# Altium PCB 3043-1-1532.PcbDoc (part 1 of 2)
Units mm, origin at the board's own origin, x right, y up, seen from the top; angles counter-clockwise.
Board outline 86 x 85.71 mm, 4 copper layers (Top Layer, Mid-Layer 1, Mid-Layer 2, Bottom Layer); 181 components, 109 nets, 536 pads, 310 vias.
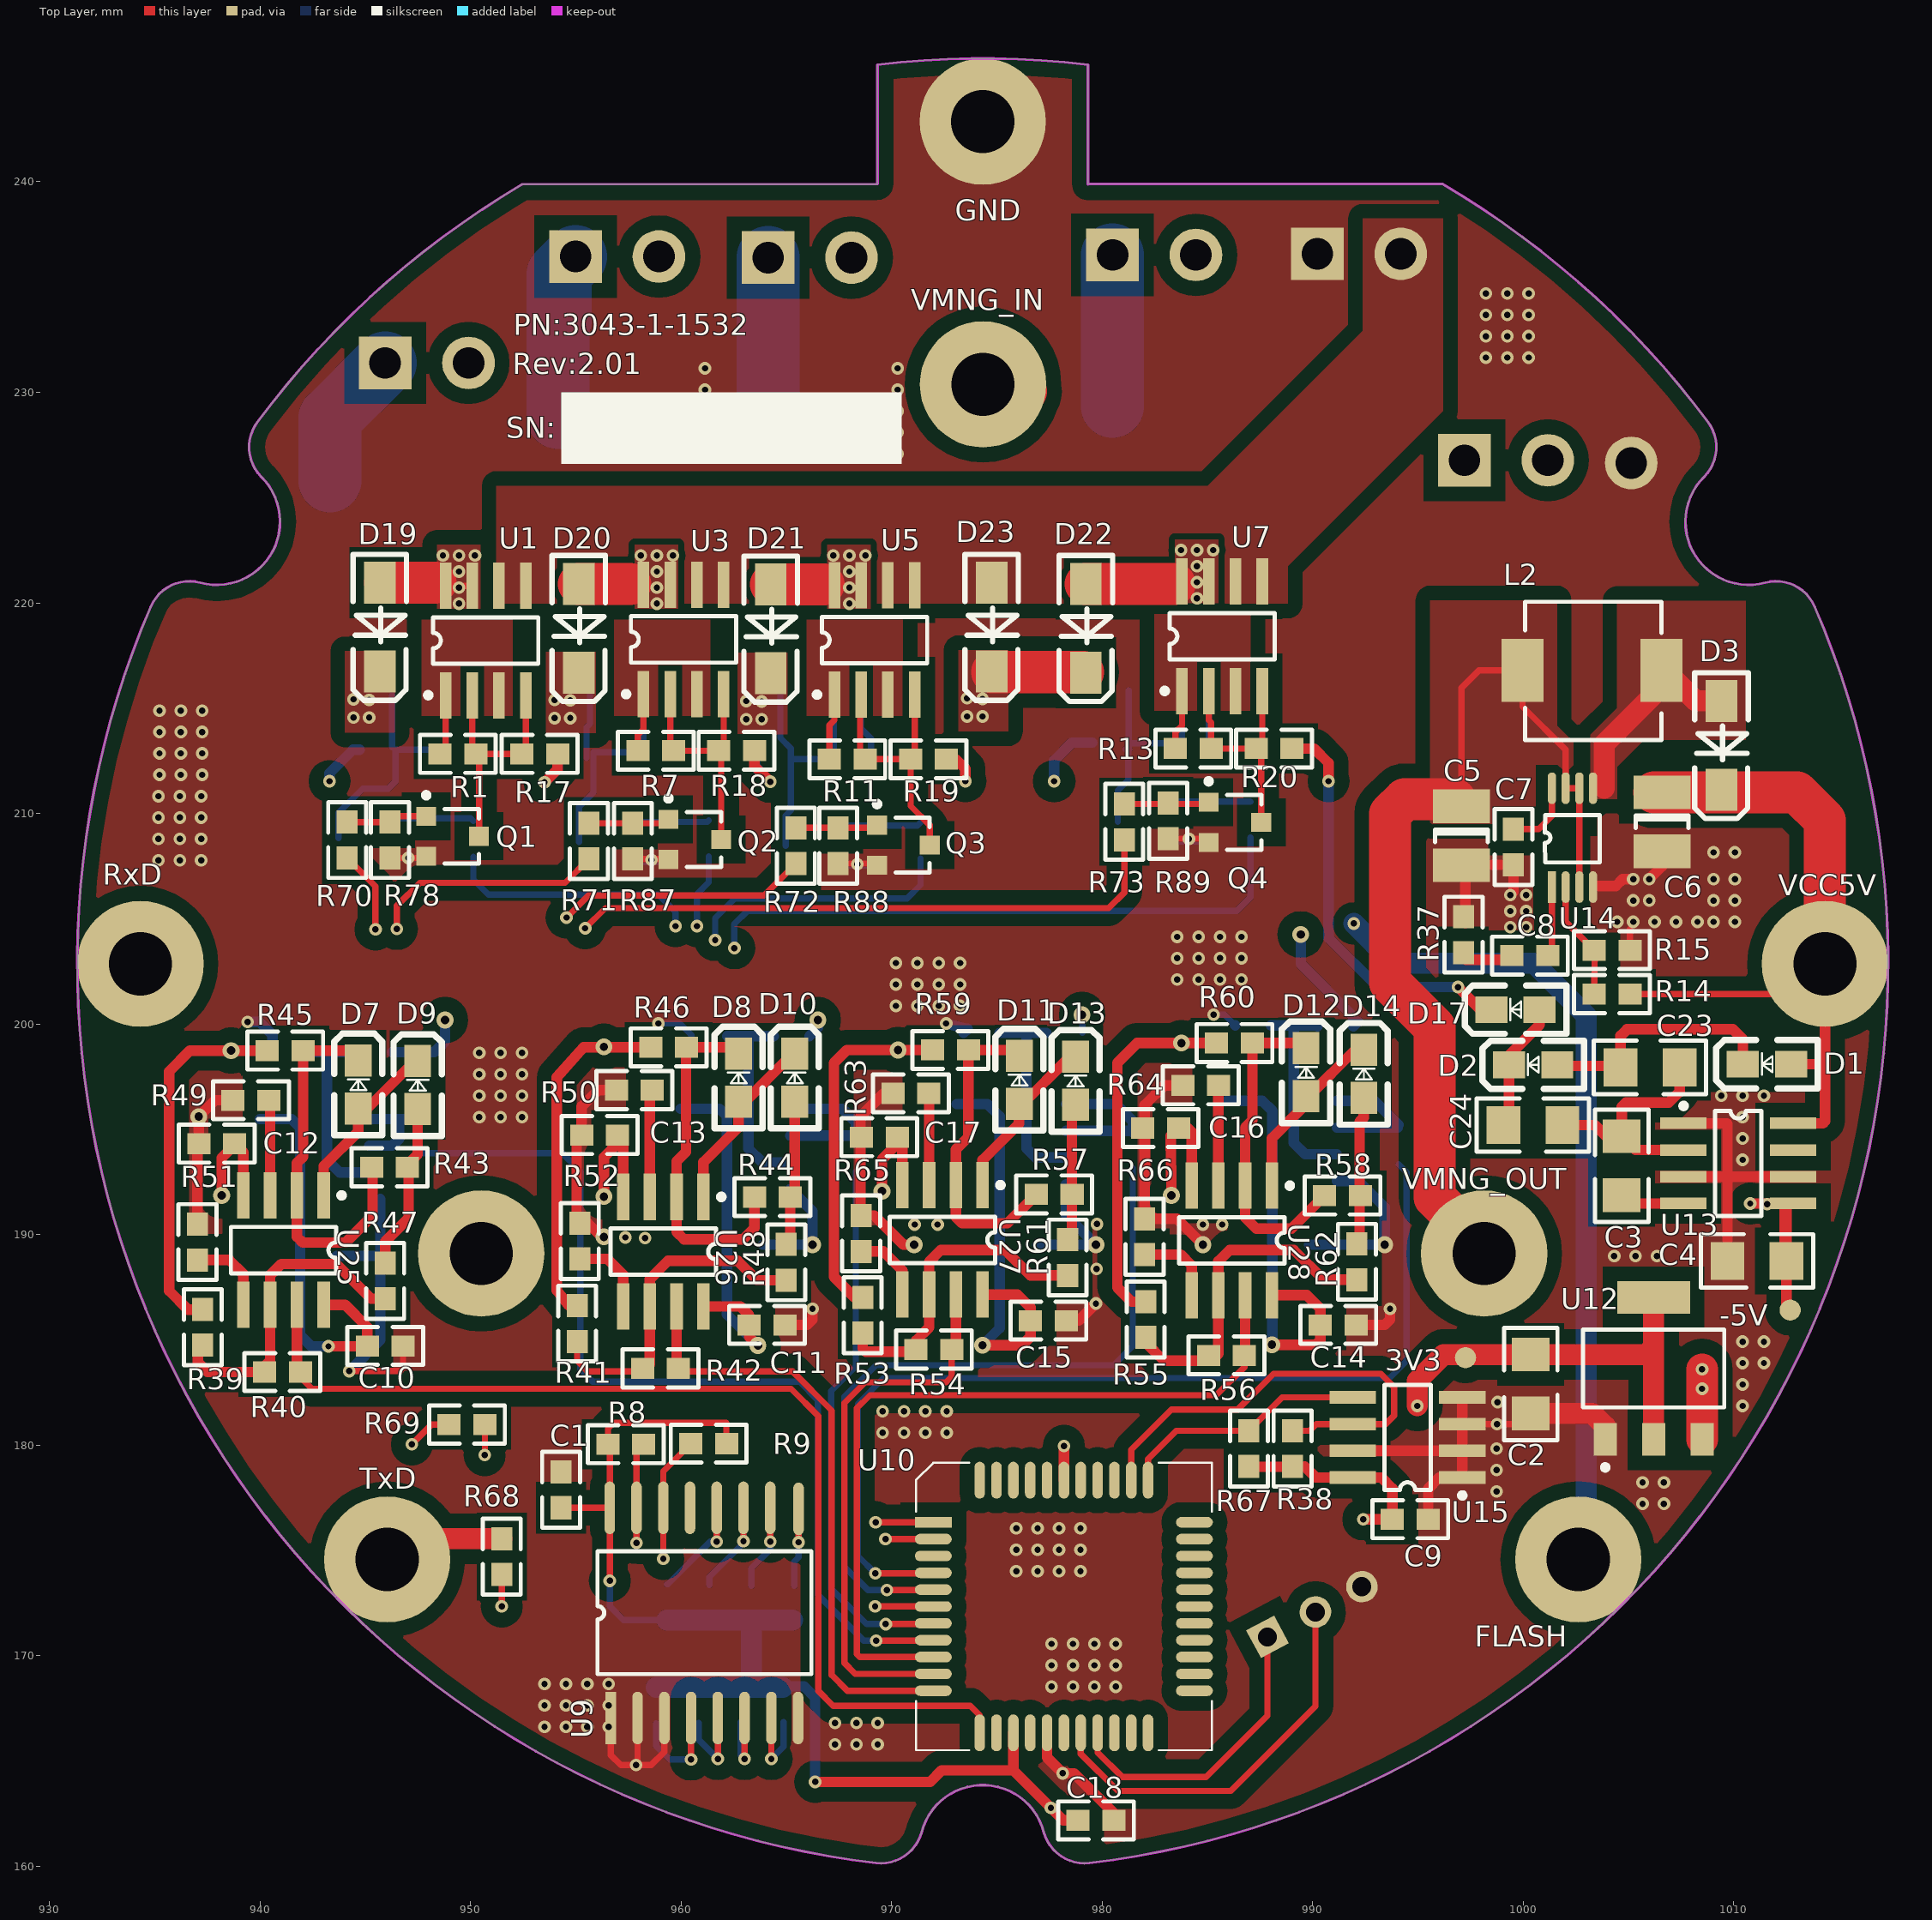
[diagram p0: Top Layer view]
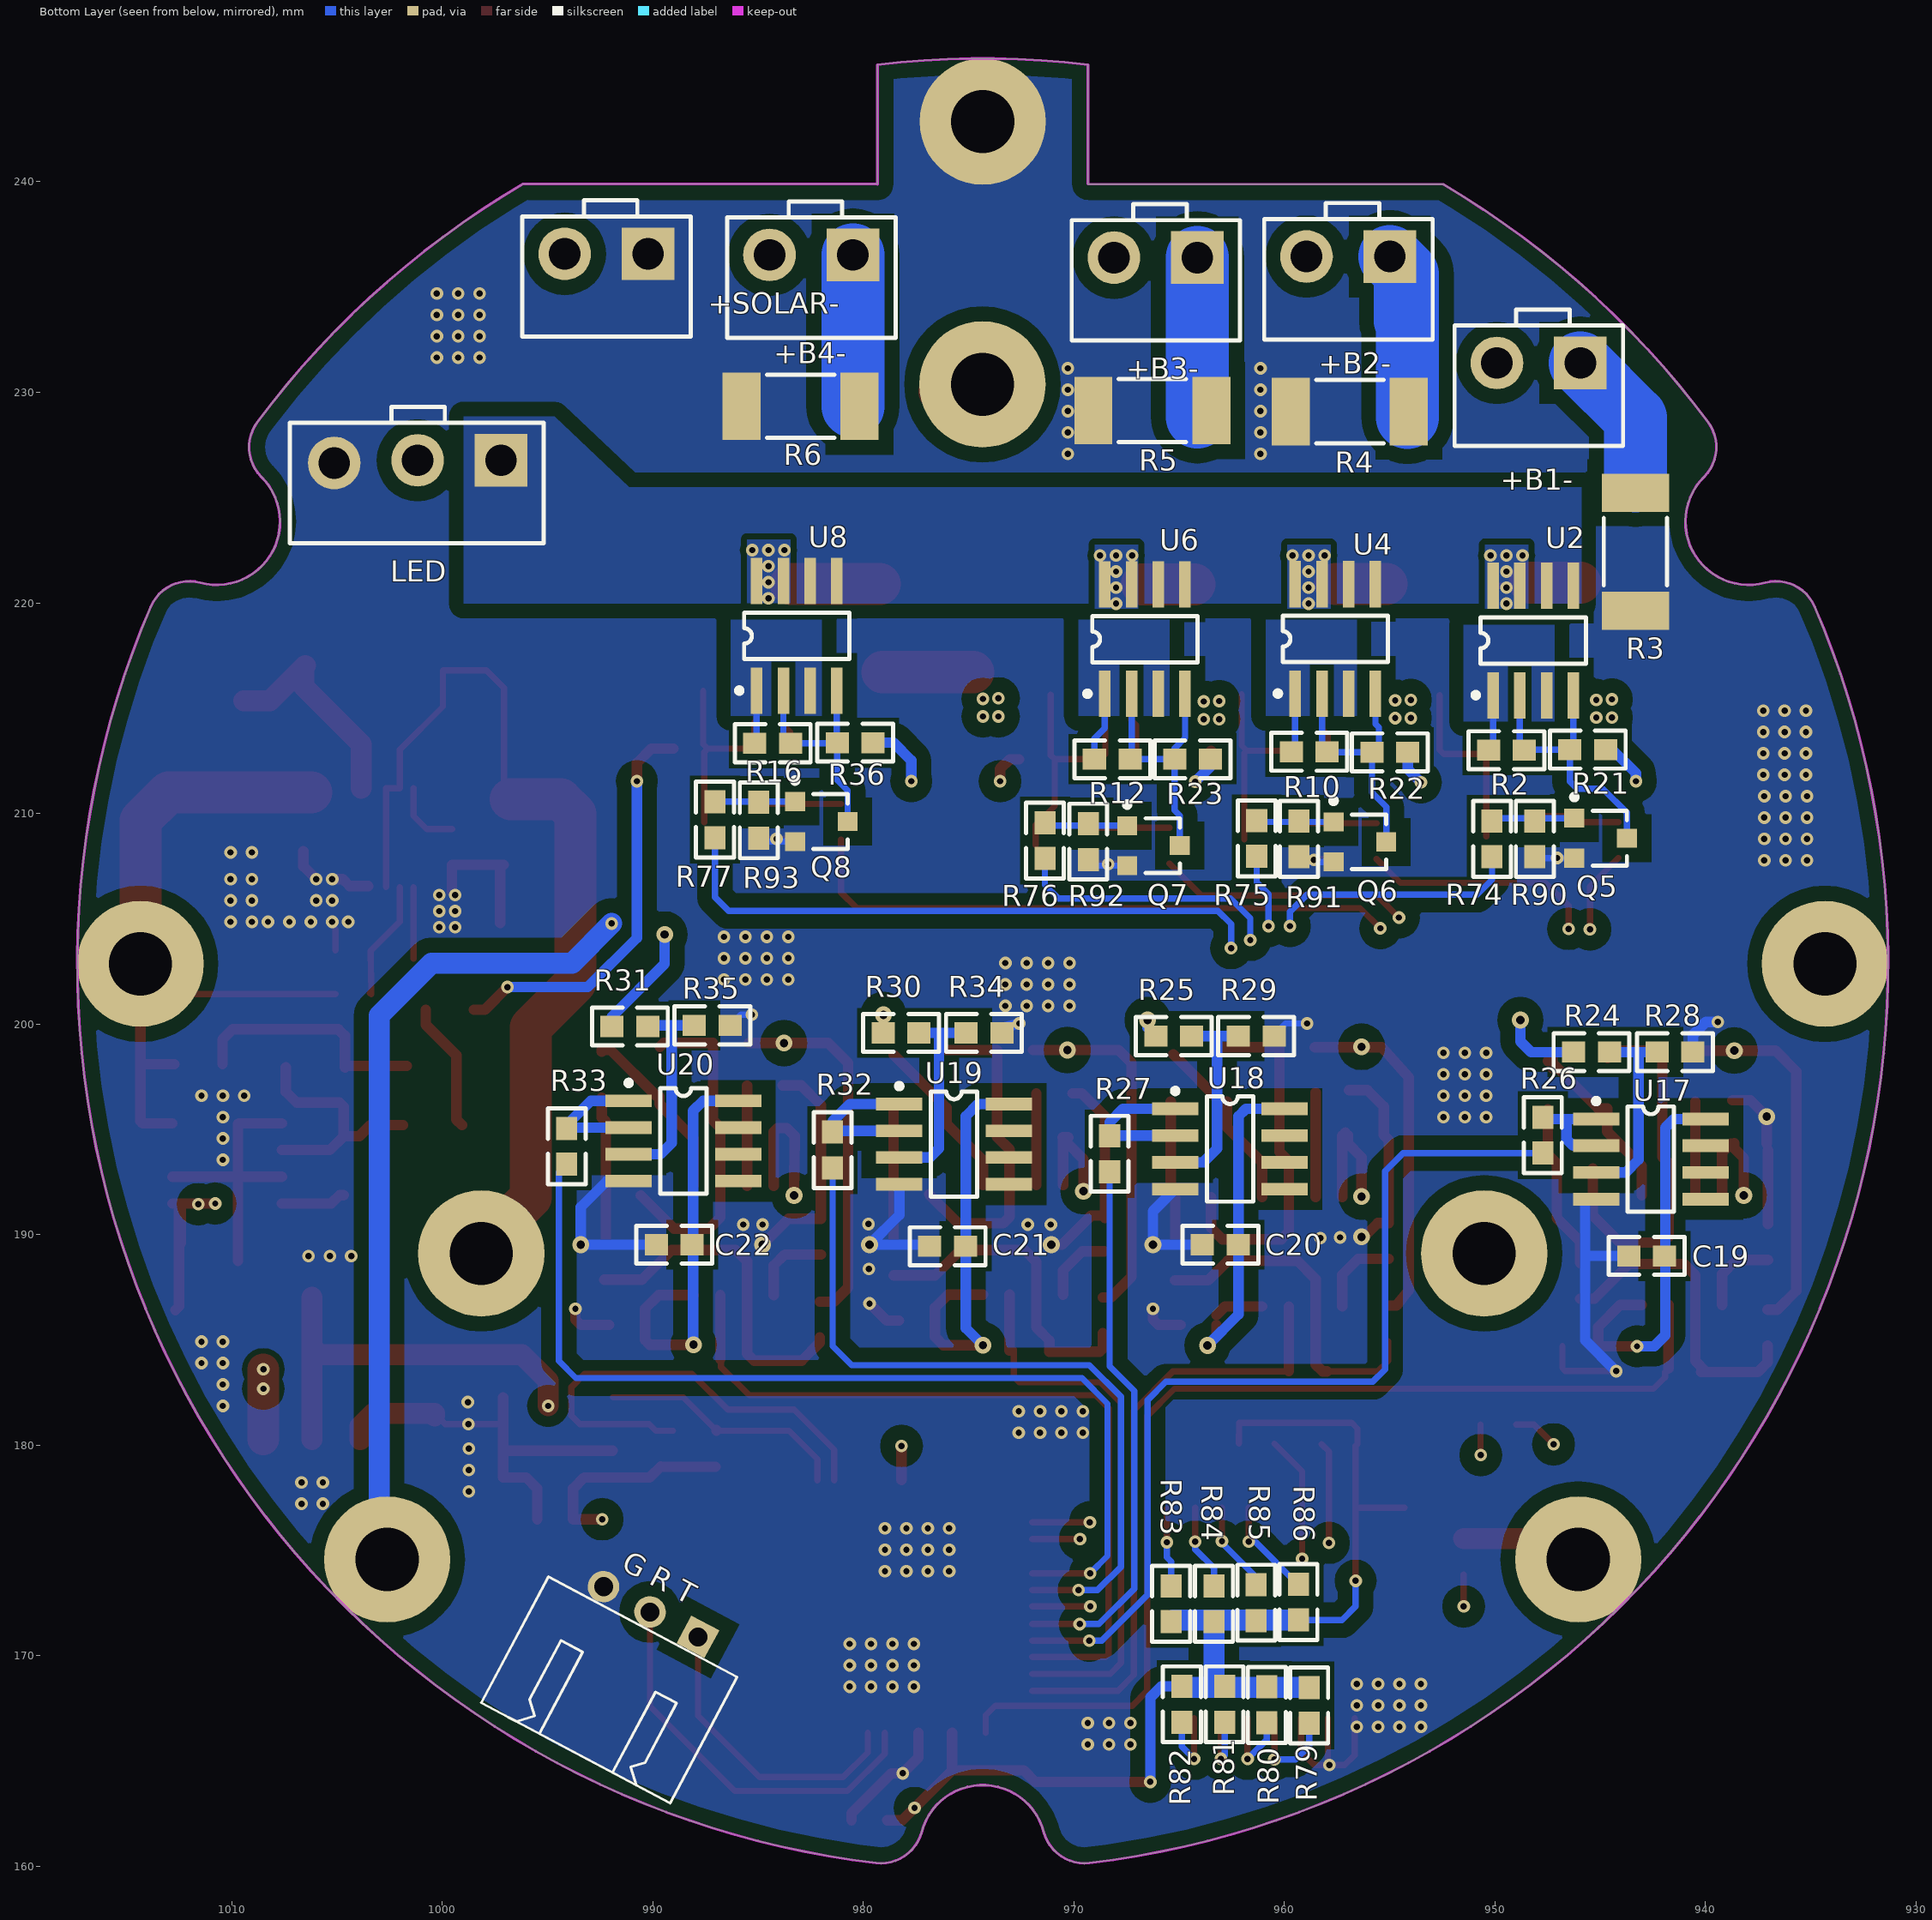
[diagram p1: Bottom Layer view, seen from below]
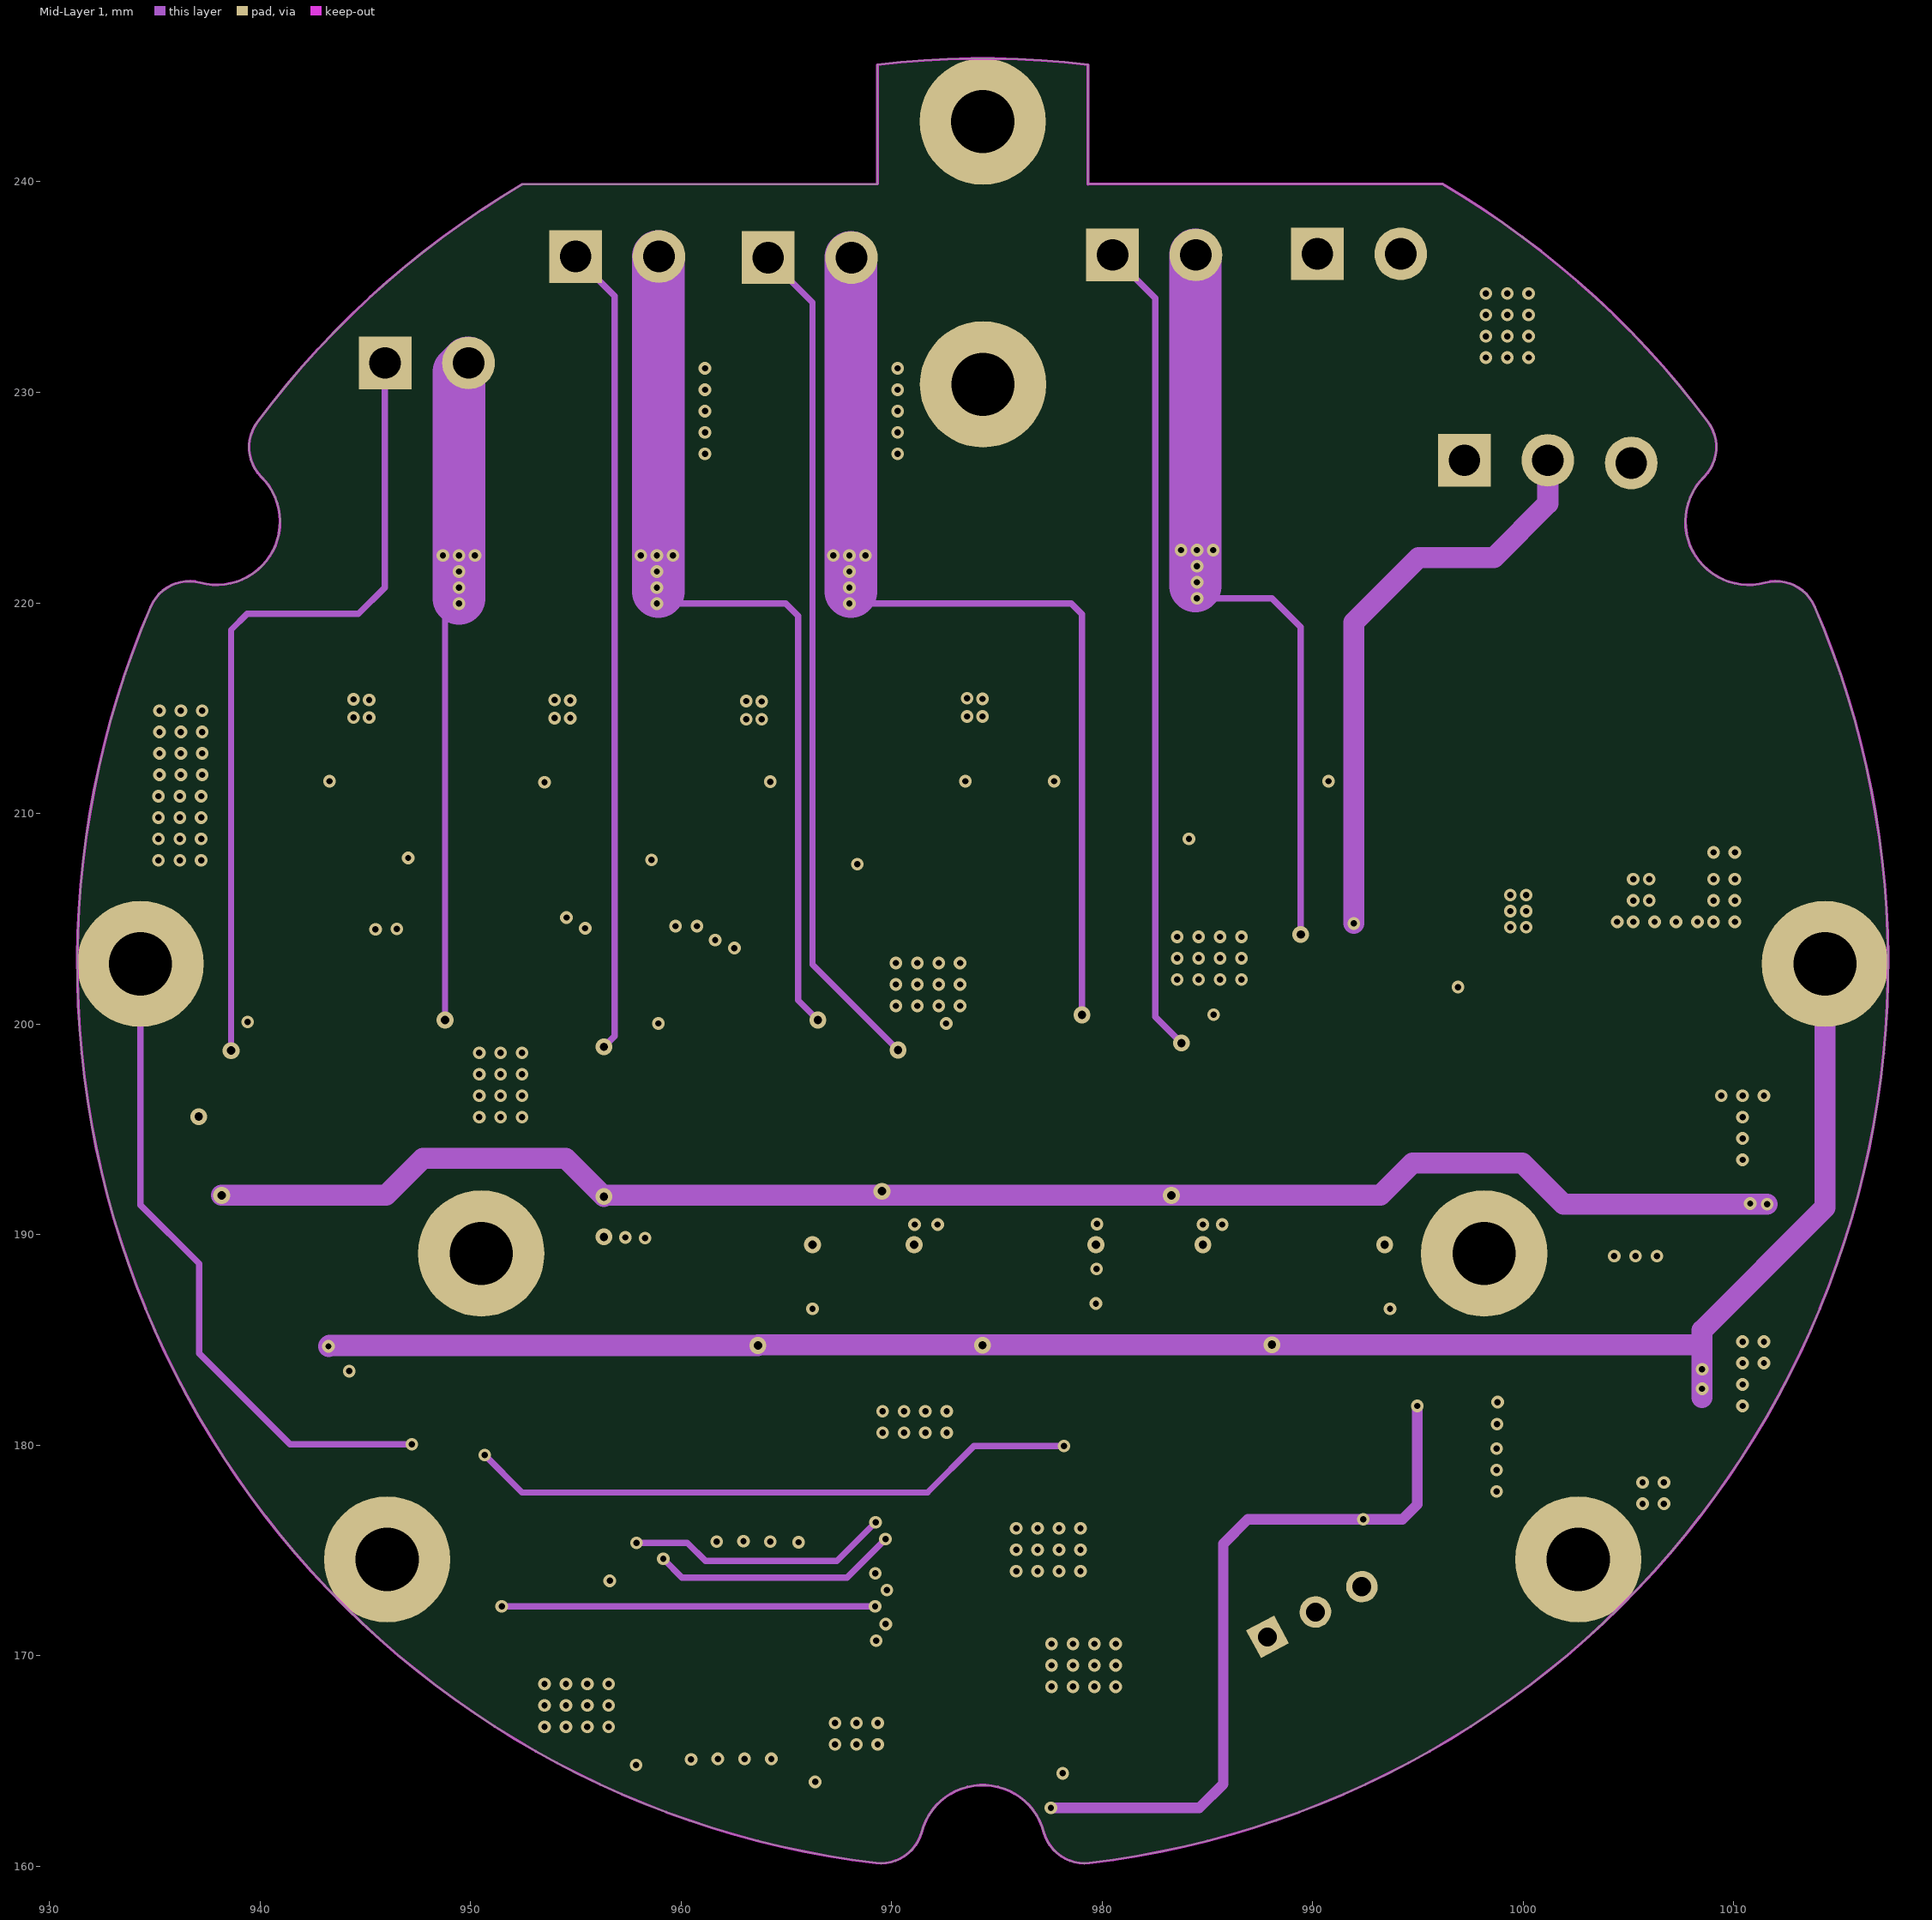
[diagram p2: Mid-Layer 1]
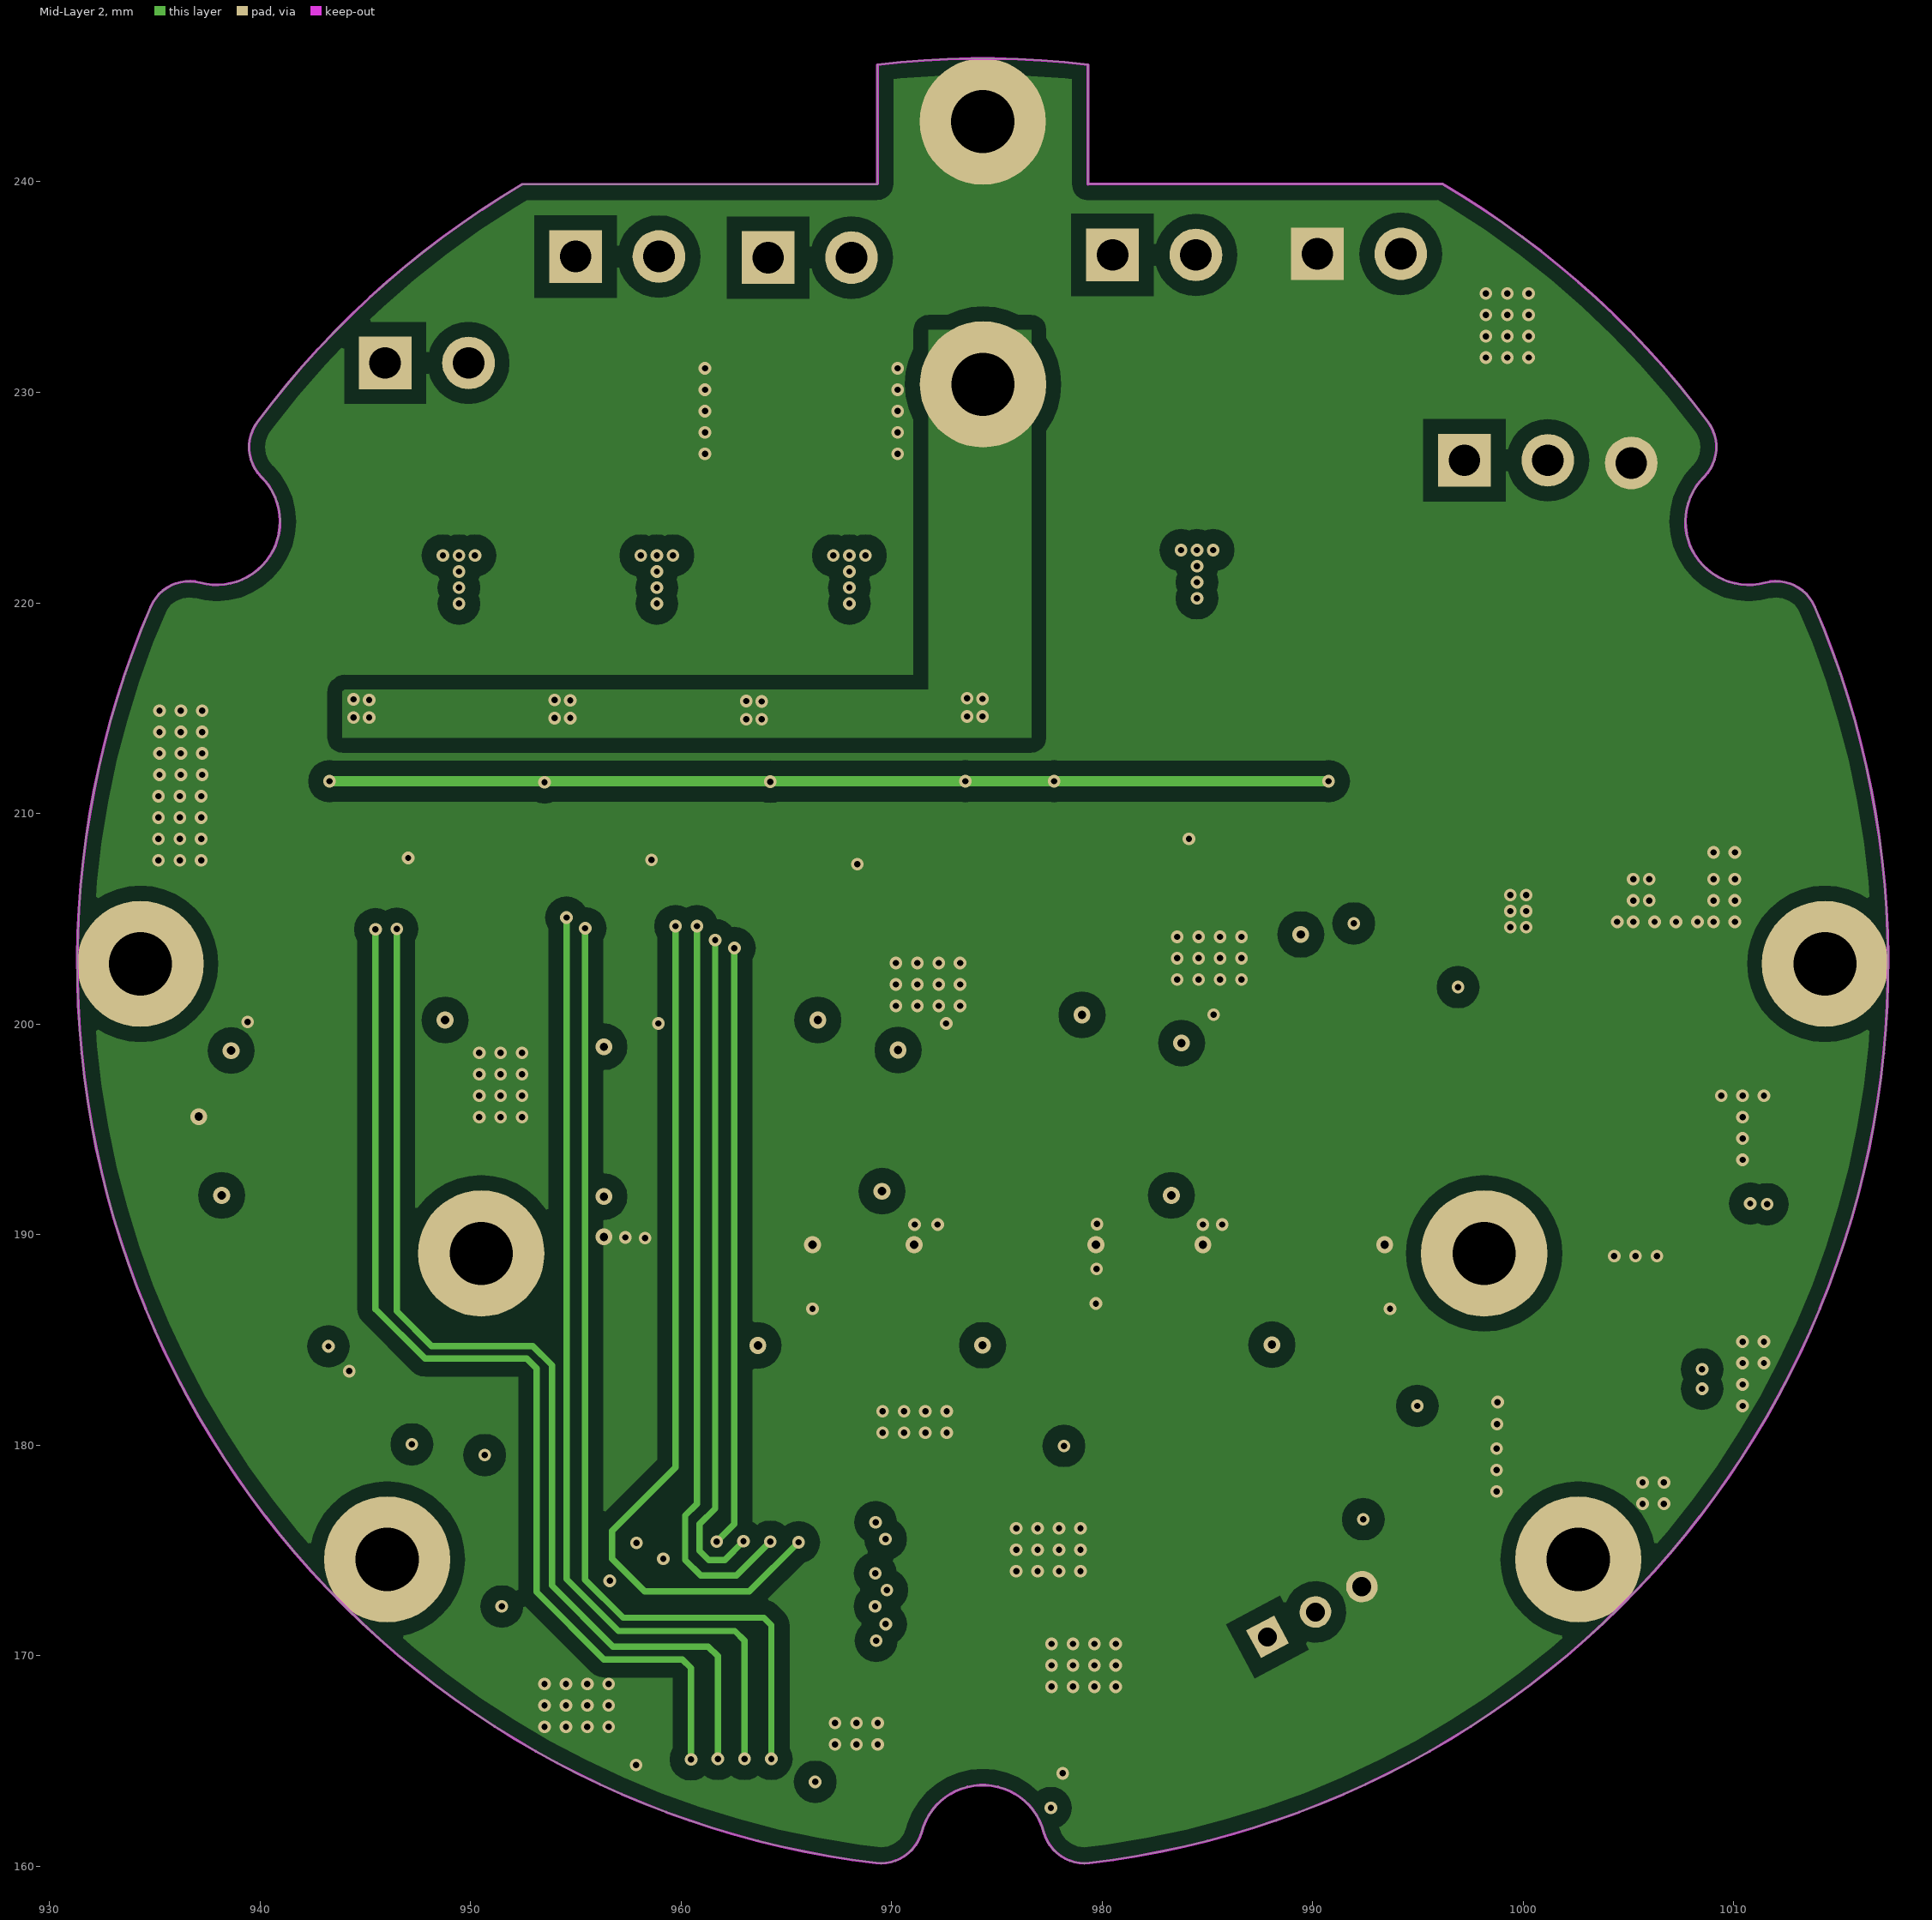
[diagram p3: Mid-Layer 2]

## Layer stack, top to bottom
Top Layer: signal copper 0.0356
Dielectric: dielectric 0.32, FR-4, Dk 4.8
Mid-Layer 1: signal copper 0.0356
Dielectric: dielectric 0.32, FR-4, Dk 4.8
Mid-Layer 2: signal copper 0.0356
Dielectric: dielectric 0.32, FR-4, Dk 4.8
Bottom Layer: signal copper 0.0356

## Board outline
934.813,219.818 cw(c936.651,219.029) 937.172,220.96 ccw(c937.953,223.856) 940.071,225.981 cw(c941.483,227.398) 939.881,228.595 cw(c974.326,202.856) 952.461,239.882 952.449,239.878 969.326,239.895 969.326,245.564 969.327,245.565 cw(c974.326,202.856) 979.326,245.565 979.326,245.564 979.326,239.887 996.165,239.898 cw(c974.326,202.856) 1008.772,228.595 cw(c1007.17,227.398) 1008.582,225.981 ccw(c1010.7,223.856) 1011.481,220.96 cw(c1012.002,219.029) 1013.84,219.818 cw(c974.326,202.856) 979.394,160.156 cw(c979.158,162.142) 977.226,161.628 ccw(c974.326,160.856) 971.427,161.628 cw(c969.494,162.142) 969.259,160.156 cw(c974.326,202.856)

## Design rules (kind name [scope] priority, off if disabled: settings)
Clearance [All] p1: gap=0.3
ComponentClearance [All] p1: gap=0 collisioncheckmode=2
HoleSize [All] p1: absolutevalues=TRUE maxlimit=10 minlimit=0.025 maxpercent=80.000 minpercent=20.000
PolygonConnect [All] p1: connectstyle=Direct reliefconductorwidth=0.254 reliefentries=4 polygonreliefangle="90 Angle"
RoutingLayers [All] p1: top layer_v5=TRUE mid layer 1_v5=FALSE mid layer 2_v5=FALSE bottom layer_v5=TRUE
RoutingVias [All] p1: holewidth=0.711 width=1.27 viastyle="Through Hole" minholewidth=0.711 minwidth=1.27 maxholewidth=0.711 maxwidth=1.27
SolderMaskExpansion [All] p1: expansion=0.102
TestPointUsage [All] p1: valid=0 allowmultiple=FALSE
Testpoint [All] p1: side=15 testpointundercomponent=TRUE minsize=1.016 maxsize=2.54 preferedsize=1.524 minholesize=0 maxholesize=1.016 preferedholesize=0.813 testpointgrid=0.025 style=1023 order=1234567890
Width [All] p1: maxlimit=10 minlimit=0.1 preferedwidth=0.254 toplayer_prefwidth=1 midlayer1_prefwidth=0.3 midlayer2_prefwidth=0.3 bottomlayer_prefwidth=1 minimp=50.000000 maximp=50.000000 favimp=50.000000
15 further rules are at their usual default settings.

## Classes and differential pairs
component class U_2-PWR_MANAGE: +B1- +B2- +B3- +B4- +SOLAR- C1 D17 Q1 Q2 Q3 Q4 Q5 Q6 Q7 Q8 R1 R2 R3 R4 R5 R6 R7 R8 R9 R10 R11 R12 R13 R16 R17 R18 R19 R20 R21 R22 R23 R36 R70 R71 R72 R73 R74 R75 R76 R77 R78 R79 R80 R81 R82 R83 R84 R85 R86 R87 R88 R89 R90 R91 R92 R93 SEN U1 U2 U3 U4 U5 U6 U7 U8 U9
component class U_5-PWR_ADC2: BT2 C19 C20 C21 C22 C32 C33 C34 C35 DS3 L1 L3 P5 R24 R25 R26 R27 R28 R29 R30 R31 R32 R33 R34 R35 TP4 TP5 U17 U18 U19 U20
component class U_5-PWR_ADC: C10 C11 C12 C13 C14 C15 C16 C17 C29 C30 C31 D7 D8 D9 D10 D11 D12 D13 D14 JP13 MARK1 MARK2 NET P3 P4 PWR R39 R40 R41 R42 R43 R44 R45 R46 R47 R48 R49 R50 R51 R52 R53 R54 R55 R56 R57 R58 R59 R60 R61 R62 R63 R64 R65 R66 Ref1 U25 U26 U27 U28 VR1 VR2
component class U_4-PWR_MANAGE_3: BT3 BT4 BT5 BT6 BT7 BT8 C9 C18 C25 C26 C27 C28 CN1 CN2 CP1 CP2 CP3 CP4 CP5 CP6 CP7 CP8 DBG FLASH "G R T" GND JP2 JP3 LED P2 R38 R67 R68 R69 RA3 RA4 RxD S1 S2 S3 S4 S5 S6 S7 S8 TP3 TP7 TP13 TP14 TP15 TP16 TP17 TP18 TxD u7 U10 U15 U24 U29 U30 U31 U57 U58 U59 U60 U61 U62 VCC5V Y1 Y2
component class U_3-PWR_BAK_BATT: 3V3 5V -5V BAT C2 C3 C4 C5 C6 C7 C8 C23 C24 C36 C38 D1 D2 D3 D19 D20 D21 D22 D23 G J1 J2 J3 J4 L2 NC P1 R14 R15 R37 R94 R95 R96 R97 R98 R99 R100 R101 R102 TP11 U12 U13 U14 U32 U63 U64 U65 U66 U67 U68 U69 VIN VMNG_IN VMNG_OUT VOUT

## Components (designator, comment, footprint, x,y, rotation, side; value= is the part's Value field where it differs from the comment)
3V3 "TP" TP_1MM 997.255,184.15 r90 top
+B1- "Header 2" VH-02H 948.487,231.394 r0 bottom
+B2- "Header 2" VH-02H 957.529,236.449 r0 bottom
+B3- "Header 2" VH-02H 966.673,236.398 r0 bottom
+B4- "Header 2" VH-02H 983.031,236.525 r0 bottom
+SOLAR- "Header 2" VH-02H 992.759,236.576 r0 bottom
-5V "TP" TP_1MM 1012.673,186.411 r90 top (schematic designator -3V3)
C1 "100nF_20%_0603" C1608-0603 954.303,177.876 r90 top
C2 "10uF_20%_1206" CC3216-1206 1000.354,181.762 r270 top
C3 "10uF_20%_1206" CC3216-1206 1004.672,194.412 r90 top
C4 "10uF_20%_1206" CC3216-1206 1009.955,188.747 r180 top
C5 "10uF_20%_1210" CC3225-1210 997.067,208.94 r270 top
C6 "10uF_20%_1210" CC3225-1210 1006.592,209.601 r270 top
C7 "10nF_20%_0603" C1608-0603 999.531,208.407 r270 top
C8 "2.2nF_20%_0603" C1608-0603 1000.312,203.251 r180 top
C9 "100nF_20%_0603" C1608-0603 994.629,176.479 r0 top
C10 "100nF_20%_0603" C1608-0603 945.947,184.709 r0 top
C11 "100nF_20%_0603" C1608-0603 964.082,185.709 r0 top
C12 "100nF_20%_0603" C1608-0603 937.946,194.32 r180 top
C13 "100nF_20%_0603" C1608-0603 956.132,194.726 r180 top
C14 "100nF_20%_0603" C1608-0603 991.21,185.709 r0 top
C15 "100nF_20%_0603" C1608-0603 977.443,185.912 r0 top
C16 "100nF_20%_0603" C1608-0603 982.777,195.056 r180 top
C17 "100nF_20%_0603" C1608-0603 969.416,194.624 r180 top
C18 "100nF_20%_0603" C1608-0603 979.703,162.179 r0 top
C19 "100nF_20%_0603" C1608-0603 942.797,188.986 r0 bottom
C20 "100nF_20%_0603" C1608-0603 963.041,189.519 r0 bottom
C21 "100nF_20%_0603" C1608-0603 975.995,189.443 r0 bottom
C22 "100nF_20%_0603" C1608-0603 988.974,189.519 r0 bottom
C23 "10uF_20%_1206" CC3216-1206 1007.161,197.942 r0 top
C24 "10uF_20%_1206" CC3216-1206 1001.598,195.199 r0 top
D1 "1N4148" LED0805 1011.453,198.095 r0 top
D2 "1N4148" LED0805 1000.354,198.069 r0 top
D3 "D Schottky" DO-214AB_SS14 1010.682,216.433 r270 top
D7 "1N4148" LED0805 944.677,197.241 r270 top
D8 "1N4148" LED0805 962.736,197.571 r270 top
D9 "1N4148" LED0805 947.496,197.215 r270 top
D10 "1N4148" LED0805 965.403,197.571 r270 top
D11 "1N4148" LED0805 976.071,197.469 r270 top
D12 "1N4148" LED0805 989.686,197.825 r270 top
D13 "1N4148" LED0805 978.738,197.418 r270 top
D14 "1N4148" LED0805 992.429,197.749 r270 top
D17 "SS34_SOD323" LED0805 999.515,200.685 r0 top
D19 "SS14" DO-214AB_SS14 946.963,222.047 r270 top
D20 "SS14" DO-214AB_SS14 956.412,221.996 r270 top
D21 "SS14" DO-214AB_SS14 965.53,221.971 r270 top
D22 "SS14" DO-214AB_SS14 980.491,221.996 r270 top
D23 "SS14" DO-214AB_SS14 976.02,222.047 r270 top
FLASH "ND" END_3_6 1002.611,174.572 r0 top
"G R T" "Header 3" XH-03H-R 990.092,172.085 r208 bottom (schematic designator "T R G")
GND "ND" END_3_6 974.326,242.856 r0 top locked
L2 "Inductor" L6x6x3_3A 1002.503,215.519 r0 top
LED "Header 3" VH-03H 997.204,226.771 r0 bottom
Q1 "MOSFET-N" SO-G3/C2.5 950.062,208.864 r270 top
Q2 "MOSFET-N" SO-G3/C2.5 961.568,208.712 r270 top
Q3 "MOSFET-N" SO-G3/C2.5 971.474,208.444 r270 top
Q4 "MOSFET-N" SO-G3/C2.5 987.222,209.525 r270 top
Q5 "MOSFET-N" SO-G3/C2.5 944.067,208.775 r270 bottom
Q6 "MOSFET-N" SO-G3/C2.5 955.497,208.598 r270 bottom
Q7 "MOSFET-N" SO-G3/C2.5 965.302,208.42 r270 bottom
Q8 "MOSFET-N" SO-G3/C2.5 981.075,209.563 r270 bottom
R1 "4.7K_1%_0603" C1608-0603 949.401,212.827 r0 top
R2 "4.7K_1%_0603" C1608-0603 949.452,213.004 r0 bottom
R3 "25mR_1%_3225" CR6332-2512 943.331,222.428 r270 bottom
R4 "25mR_1%_3225" CR6332-2512 956.894,229.083 r0 bottom
R5 "25mR_1%_3225" CR6332-2512 966.267,229.133 r0 bottom
R6 "25mR_1%_3225" CR6332-2512 982.98,229.337 r0 bottom
R7 "4.7K_1%_0603" C1608-0603 958.799,212.979 r180 top
R8 "4.7K_5%_0603" C1608-0603 957.377,180.045 r0 top
R9 "4.7K_5%_0603" C1608-0603 961.314,180.07 r180 top
R10 "4.7K_1%_0603" C1608-0603 958.825,212.928 r0 bottom
R11 "4.7K_1%_0603" C1608-0603 967.892,212.573 r180 top
R12 "4.7K_1%_0603" C1608-0603 968.172,212.573 r0 bottom
R13 "4.7K_1%_0603" C1608-0603 984.326,213.081 r180 top
R14 "10K_1%_0603" C1608-0603 1004.214,201.422 r180 top
R15 "3.3K_1%_0603" C1608-0603 1004.214,203.505 r0 top
R16 "4.7K_1%_0603" C1608-0603 984.301,213.335 r0 bottom
R17 "4.7K_1%_0603" C1608-0603 953.287,212.827 r0 top
R18 "4.7K_1%_0603" C1608-0603 962.635,212.979 r0 top
R19 "4.7K_1%_0603" C1608-0603 971.753,212.573 r0 top
R20 "4.7K_1%_0603" C1608-0603 988.162,213.081 r0 top
R21 "4.7K_1%_0603" C1608-0603 945.591,213.03 r180 bottom
R22 "4.7K_1%_0603" C1608-0603 954.989,212.903 r180 bottom
R23 "4.7K_1%_0603" C1608-0603 964.362,212.573 r180 bottom
R24 "10K_5%_0603" C1608-0603 945.413,198.663 r0 bottom
R25 "10K_5%_0603" C1608-0603 965.251,199.425 r0 bottom
R26 "10K_5%_0603" C1608-0603 947.725,194.716 r270 bottom
R27 "10K_5%_0603" C1608-0603 968.299,193.837 r270 bottom
R28 "10K_5%_0603" C1608-0603 941.451,198.663 r0 bottom
R29 "10K_5%_0603" C1608-0603 961.339,199.425 r0 bottom
R30 "10K_5%_0603" C1608-0603 978.205,199.577 r0 bottom
R31 "10K_5%_0603" C1608-0603 991.083,199.882 r0 bottom
R32 "10K_5%_0603" C1608-0603 981.456,194.015 r270 bottom
R33 "10K_5%_0603" C1608-0603 994.08,194.193 r270 bottom
R34 "10K_5%_0603" C1608-0603 974.268,199.577 r0 bottom
R35 "10K_5%_0603" C1608-0603 987.171,199.933 r0 bottom
R36 "4.7K_1%_0603" C1608-0603 980.389,213.36 r180 bottom
R37 "10K_1%_0603" C1608-0603 997.163,204.241 r90 top
R38 "4.7K_5%_0603" C1608-0603 989.041,179.832 r270 top
R39 "20K_5%_0603" C1608-0603 937.285,185.598 r90 top
R40 "200K_5%_0603" C1608-0603 941.07,183.471 r180 top
R41 "20K_5%_0603" C1608-0603 955.065,185.776 r90 top
R42 "200K_5%_0603" C1608-0603 959.028,183.642 r180 top
R43 "20K_5%_0603" C1608-0603 946.15,193.192 r180 top
R44 "20K_5%_0603" C1608-0603 964.336,191.78 r180 top
R45 "20K_5%_0603" C1608-0603 941.197,198.737 r180 top
R46 "20K_5%_0603" C1608-0603 959.409,198.892 r180 top
R47 "10K_5%_0603" C1608-0603 945.947,187.803 r90 top
R48 "10K_5%_0603" C1608-0603 964.997,188.681 r90 top
R49 "10K_5%_0603" C1608-0603 939.571,196.377 r180 top
R50 "10K_5%_0603" C1608-0603 957.783,196.86 r180 top
R51 "10K_5%_0603" C1608-0603 937.031,189.643 r90 top
R52 "10K_5%_0603" C1608-0603 955.192,189.687 r90 top
R53 "20K_5%_0603" C1608-0603 968.629,186.166 r90 top
R54 "200K_5%_0603" C1608-0603 972.007,184.541 r180 top
R55 "20K_5%_0603" C1608-0603 982.066,185.963 r90 top
R56 "200K_5%_0603" C1608-0603 985.901,184.261 r180 top
R57 "20K_5%_0603" C1608-0603 977.722,191.907 r180 top
R58 "20K_5%_0603" C1608-0603 991.413,191.856 r180 top
R59 "20K_5%_0603" C1608-0603 972.795,198.765 r180 top
R60 "20K_5%_0603" C1608-0603 986.282,199.095 r180 top
R61 "10K_5%_0603" C1608-0603 978.357,188.909 r90 top
R62 "10K_5%_0603" C1608-0603 992.099,188.706 r90 top
R63 "10K_5%_0603" C1608-0603 970.915,196.707 r180 top
R64 "10K_5%_0603" C1608-0603 984.682,197.088 r180 top
R65 "10K_5%_0603" C1608-0603 968.553,190.052 r90 top
R66 "10K_5%_0603" C1608-0603 982.015,189.9 r90 top
R67 "4.7K_5%_0603" C1608-0603 986.968,179.832 r270 top
R68 "0R_5%_0603" C1608-0603 951.484,174.701 r90 top
R69 "0R_5%_0603" C1608-0603 949.833,180.975 r180 top
R70 "4.7K_1%_0603" C1608-0603 944.143,208.737 r270 top
R71 "4.7K_1%_0603" C1608-0603 955.624,208.686 r270 top
R72 "4.7K_1%_0603" C1608-0603 965.454,208.47 r270 top
R73 "4.7K_1%_0603" C1608-0603 981.05,209.601 r270 top
R74 "4.7K_1%_0603" C1608-0603 950.138,208.788 r270 bottom
R75 "4.7K_1%_0603" C1608-0603 961.314,208.813 r270 bottom
R76 "4.7K_1%_0603" C1608-0603 971.372,208.712 r270 bottom
R77 "4.7K_1%_0603" C1608-0603 987.044,209.702 r270 bottom
R78 "4.7K_1%_0603" C1608-0603 946.175,208.737 r270 top
R79 "10K_5%_0603" C1608-0603 958.825,167.64 r90 bottom
R80 "10K_5%_0603" C1608-0603 960.831,167.665 r90 bottom
R81 "10K_5%_0603" C1608-0603 962.838,167.691 r90 bottom
R82 "10K_5%_0603" C1608-0603 964.87,167.691 r90 bottom
R83 "10K_5%_0603" C1608-0603 965.378,172.466 r270 bottom
R84 "10K_5%_0603" C1608-0603 963.346,172.466 r270 bottom
R85 "10K_5%_0603" C1608-0603 961.339,172.517 r270 bottom
R86 "10K_5%_0603" C1608-0603 959.333,172.542 r270 bottom
R87 "4.7K_1%_0603" C1608-0603 957.707,208.686 r270 top
R88 "4.7K_1%_0603" C1608-0603 967.461,208.47 r270 top
R89 "4.7K_1%_0603" C1608-0603 983.132,209.652 r270 top
R90 "4.7K_1%_0603" C1608-0603 948.106,208.788 r270 bottom
R91 "4.7K_1%_0603" C1608-0603 959.307,208.788 r270 bottom
R92 "4.7K_1%_0603" C1608-0603 969.315,208.661 r270 bottom
R93 "4.7K_1%_0603" C1608-0603 984.961,209.677 r270 bottom
RxD "ND" END_3_6 934.326,202.856 r0 top locked
TxD "ND" END_3_6 946.042,174.572 r0 top locked
U1 "SI4953DY" SO-8 950.722,218.211 r0 top
U2 "SI4953DY" SO-8 948.182,218.211 r180 bottom
U3 "SI4953DY" SO-8 960.12,218.262 r0 top
U4 "SI4953DY" SO-8 957.58,218.288 r180 bottom
U5 "SI4953DY" SO-8 969.188,218.237 r0 top
U6 "SI4953DY" SO-8 966.622,218.278 r180 bottom
U7 "SI4953DY" SO-8 985.698,218.415 r0 top
U8 "SI4953DY" SO-8 983.158,218.43 r180 bottom
U9 "PCF8574T" SOP16_P1.27_B10 959.155,169.529 r90 top
U10 "STC15F2K60S2_QFP44" PQFP44 971.982,176.336 r0 top
U12 "REG1117-3.3" SOT223 1005.307,183.007 r0 top
U13 "TP7660" SO-8 1010.209,193.38 r270 top
U14 "MP1542" MSOP8 1001.36,206.502 r90 top
U15 "24LC128" 8s1 994.502,180.365 r90 top
U17 "LM358D" 751-02 942.594,193.584 r270 bottom
U18 "LM358D" 751-02 962.584,194.066 r270 bottom
U19 "LM358D" 751-02 975.69,194.294 r270 bottom
U20 "LM358D" 751-02 988.543,194.447 r270 bottom
U25 "LM358D" 751-02 941.121,189.262 r180 top
U26 "LM358D" 751-02 959.155,189.189 r180 top
U27 "LM358D" 751-02 972.414,189.748 r180 top
U28 "LM358D" 751-02 986.155,189.722 r180 top
VCC5V "ND" END_3_6 1014.326,202.856 r0 top
VMNG_IN "ND" END_3_6 974.341,230.378 r0 top
VMNG_OUT "ND" END_3_6 998.142,189.106 r90 top locked

## Footprints (in the part's own frame and the unit in brackets; to place one, negate y for a bottom-side part, rotate by r counter-clockwise, add the part's x,y. Pads: shape width x height; smd on the part's side, far side on the other; paste and mask are expansions set on the pad)
8s1 [mm] "Small Outline; 8 Leads; Body Width 3.9 mm; Pitch 1.27 mm"
  rect 0.6x2.2 smd: 1(-1.905,-2.6) 2(-0.635,-2.6) 3(0.635,-2.6) 4(1.905,-2.6) 5(1.905,2.6) 6(0.635,2.6) 7(-0.635,2.6) 8(-1.905,2.6)
  silkscreen extent -2.88,-2.72 2.5,1.1
751-02 [mm] "Small Outline; 8 Leads; Body Width 3.9 mm; Pitch 1.27 mm"
  rect 0.6x2.2 smd: 1(-1.905,-2.6) 2(-0.635,-2.6) 3(0.635,-2.6) 4(1.905,-2.6) 5(1.905,2.6) 6(0.635,2.6) 7(-0.635,2.6) 8(-1.905,2.6)
  silkscreen extent -2.88,-2.72 2.5,1.1
C1608-0603 [mm] "Chip Resistor; Body 1.6 x 0.8 mm (LxW typ)"
  rect 1.1x1 smd: 1(-0.85,0) 2(0.85,0)
  silkscreen extent -1.8,-0.9 1.8,0.9
CC3216-1206 [mm]
  rect 1.6x1.8 smd: 1(-2.54,0) 2(0.26,0)
  silkscreen extent -3.81,-1.27 1.52,1.27
CC3225-1210 [mm] "Chip Capacitor; Body 3.2 x 2.5 mm (LxW typ)"
  rect 1.6x2.7 smd: 1(-1.4,0) 2(1.4,0)
  silkscreen extent -0.3,-1.25 0.3,1.25
CR6332-2512 [mm] "Chip Resistor; Body 6.3 x 3.2 mm (LxW typ)"
  rect 1.8x3.2 smd: 1(-2.8,0) 2(2.8,0)
  silkscreen extent -1.6,-1.5 1.6,1.5
DO-214AB_SS14 [mm]
  rect 2x1.5 smd: 1(1.092,-1.27) 2(5.309,-1.27)
  silkscreen extent -0.25,-2.54 6.68,0
END_3_6 [mm]
  round 6 hole 3: 1(0,0)
L6x6x3_3A [mm]
  rect 2x3 smd: 1(-2.54,1.27) 2(4.064,1.27)
  silkscreen extent -2.41,-2.03 4.06,4.53
LED0805 [mil]
  rect 60x50 smd: 1(49.55,-0.2) 2(-40.45,-0.2)
  silkscreen extent -90,-45 100,45
MSOP8 [mm]
  rect 1.5x0.4 smd: 1(0,0)
  oval 1.5x0.4 smd: 2(0,-0.65) 3(0,-1.3) 4(0,-1.95) 5(4.695,-1.95) 6(4.695,-1.3) 7(4.695,-0.65) 8(4.695,0)
  silkscreen extent 1.17,-2.28 3.42,0.33
PQFP44 [mm]
  rect 1.75x0.5 smd: 1(0,0)
  oval 1.75x0.5 smd: 2(0,-0.8) 3(0,-1.6) 4(0,-2.4) 5(0,-3.2) 6(0,-4) 7(0,-4.8) 8(0,-5.6) 9(0,-6.4) 10(0,-7.2) 11(0,-8) 23(12.4,-8) 24(12.4,-7.2) 25(12.4,-6.4) 26(12.4,-5.6) 27(12.4,-4.8) 28(12.4,-4) 29(12.4,-3.2) 30(12.4,-2.4) 31(12.4,-1.6) 32(12.4,-0.8) 33(12.4,0)
  oval 0.5x1.75 smd: 12(2.2,-10) 13(3,-10) 14(3.8,-10) 15(4.6,-10) 16(5.4,-10) 17(6.2,-10) 18(7,-10) 19(7.8,-10) 20(8.6,-10) 21(9.4,-10) 22(10.2,-10) 34(10.2,2) 35(9.4,2) 36(8.6,2) 37(7.8,2) 38(7,2) 39(6.2,2) 40(5.4,2) 41(4.6,2) 42(3.8,2) 43(3,2) 44(2.2,2)
  silkscreen extent -0.82,-10.83 13.23,2.83
SO-8 [mm] "Plastic Small Outline; 8 Leads; Body Width 3.9 mm"
  rect 0.55x2.2 smd: 1(-1.905,-2.6) 2(-0.635,-2.6) 3(0.635,-2.6) 4(1.905,-2.6) 5(1.905,2.6) 6(0.635,2.6) 7(-0.635,2.6) 8(-1.905,2.6)
  silkscreen extent -2.85,-2.72 2.5,1.1
SO-G3/C2.5 [mm] "SOT-23; 3 Leads; Body 3.0 x 2.6 mm, inc. leads (LxW max)"
  rect 0.9x0.95 smd: 1(-1.001,-2.164) 2(0.899,-2.164) 3(-0.051,0.336)
  silkscreen extent -2.13,-2.29 1.25,0.34
SOP16_P1.27_B10 [mm]
  rect 2.5x0.5 smd: 1(-2.489,2.489)
  oval 2.5x0.5 smd: 2(-2.489,1.219) 3(-2.489,-0.051) 4(-2.489,-1.321) 5(-2.489,-2.591) 6(-2.489,-3.861) 7(-2.489,-5.131) 8(-2.489,-6.401) 9(7.442,-6.426) 10(7.493,-5.08) 11(7.493,-3.81) 12(7.493,-2.54) 13(7.493,-1.27) 14(7.493,0) 15(7.493,1.27) 16(7.493,2.54)
  silkscreen extent -0.4,-7.04 5.43,3.12
SOT223 [mm]
  rect 1.1x1.55 smd: 1(-1.414,-2.74) 2(0.886,-2.74) 3(3.186,-2.74)
  rect 3.45x1.55 smd: 2(0.886,4.01)
  silkscreen extent -2.46,-4.19 4.24,2.48
TP_1MM [mm]
  round 1 smd: 1(0,0)
VH-02H [mm] "VH Serial,3.96mm pitch"
  rect 2.5x2.5 hole 1.5: 1(-2.54,0)
  round 2.5 hole 1.5: 2(1.42,0)
  silkscreen extent -4.57,-2.54 3.43,3.94
VH-03H [mm] "VH Serial,3.96mm pitch"
  rect 2.5x2.5 hole 1.5: 1(0,0)
  round 2.5 hole 1.5: 2(3.96,0) 3(7.92,0.127)
  silkscreen extent -2.03,-2.54 10.03,3.94
XH-03H-R [mm]
  rect 1.5x1.5 hole 0.9: 1(2.54,0)
  round 1.5 hole 0.9: 2(-0.025,-0.025) 3(-2.54,0)
  silkscreen extent -5.08,-7.59 5.08,-0.81

## Part data
3V3 -5V: library part TP_1mm
+B1- +B2- +B3- +B4- +SOLAR-: "Header, 2-Pin"
C1 C2 C3 C4 C5 C6 C7 C8 C9 C10 C11 C12 C13 C14 C15 C16 C17 C18 C19 C20 C21 C22 C23 C24: library part Cap2, "Capacitor"
D1 D2 D17 D19 D20 D21 D22 D23: library part "D Schottky", "Schottky Diode"
D3: "Schottky Diode"
D7 D8 D9 D10 D11 D12 D13 D14: library part "D Tunnel1", "Tunnel Diode - RLC Model"
FLASH RxD TxD VCC5V VMNG_IN VMNG_OUT: library part COAX-F, "Coax-F Connector"
"G R T" LED: "Header, 3-Pin"
R1 R2 R3 R4 R5 R6 R7 R8 R9 R10 R11 R12 R13 R14 R15 R16 R17 R18 R19 R20 R21 R22 R23 R24 R25 R26 R27 R28 R29 R30 R31 R32 R33 R34 R35 R36 R37 R38 R39 R40 R41 R42 R43 R44 R45 R46 R47 R48 R49 R50 R51 R52 R53 R54 R55 R56 R57 R58 R59 R60 R61 R62 R63 R64 R65 R66 R67 R68 R69 R70 R71 R72 R73 R74 R75 R76 R77 R78 R79 R80 R81 R82 R83 R84 R85 R86 R87 R88 R89 R90 R91 R92 R93: library part Res3, "Resistor"
U1 U2 U3 U4 U5 U6 U7 U8: library part TLP3107, "TLP3107"
U12: library part "Volt Reg", "Voltage Regulator"
U14: library part AP2004
U15: library part 24LC02, "IC"
U17 U18 U19 U20 U25 U26 U27 U28: "Dual Low-Power Operational Amplifier"

## Free pads (board coordinates)
  round 6 hole 3: 7(950.511,189.106)

## Via types
v1: diameter 0.6, hole 0.3, Top Layer to Bottom Layer, 288 vias
v2: diameter 0.8, hole 0.4, Top Layer to Bottom Layer, 22 vias

## Nets (pads, with @x,y where several pads share a name; then routed paths per layer and width w, separated by ;. In a path a pad name is that pad's centre, name@x,y a point inside that pad or via, vN(x,y) a via of type N, cw(c..) or ccw(c..) an arc to the next point about the centre after c; other vN are vias at no path point)
BC1: R40.1 U10.12 U25.7 | length 50.6
  Top Layer w0.3: R40.1@941.92,183.471 941.92,183.224 942.467,182.677 965.225,182.677 966.521,181.381 966.521,168.326 967.222,167.624 973.709,167.615 ; 973.734,167.624 974.182,167.177 U10.12@974.182,166.336
  Top Layer w0.5: R40.1@941.756,183.635 U25.7@941.756,186.662
BC2: R42.1 U10.11 U26.7 | length 28.8
  Top Layer w0.3: R42.1@959.878,183.499 965.292,183.499 967.156,181.635 967.156,169.088 967.907,168.336 U10.11@971.982,168.336
  Top Layer w0.5: R42.1@959.79,183.525 U26.7@959.79,186.589
BC3: R54.1 U10.10 U27.7 | length 26.3
  Top Layer w0.3: U10.10@971.982,169.136 968.276,169.136 967.756,169.656 967.756,182.007 968.731,182.982 972.591,182.982 972.857,183.247 R54.1@972.857,184.541
  Top Layer w0.5: R54.1@973.049,184.502 U27.7@973.049,187.148
BC4: R56.1 U10.9 U28.7 | length 38.2
  Top Layer w0.3: U10.9@971.982,169.936 968.492,169.936 968.356,170.072 968.356,181.758 968.97,182.372 985.418,182.372 986.751,183.705 R56.1@986.751,184.261
  Top Layer w0.5: R56.1@986.79,184.095 U28.7@986.79,187.122
BV1: R26.2 U10.8 | length 44.8
  Top Layer w0.3: v1(969.264,170.713) U10.8@971.982,170.711
  Bottom Layer w0.3: R26.2@947.725,193.866 954.366,193.866 955.218,193.015 955.218,183.591 955.802,183.007 965.632,183.007 966.495,182.143 966.495,172.898 968.68,170.713 v1(969.264,170.713)
BV2: R27.2 U10.7 | length 25.8
  Top Layer w0.3: v1(969.721,171.501) U10.7@971.982,171.511
  Bottom Layer w0.3: R27.2@968.299,192.987 968.299,183.744 967.13,182.575 967.13,173.177 968.807,171.501 v1(969.721,171.501)
BV3: R32.2 U10.5 | length 35.9
  Top Layer w0.3: v1(969.772,173.111) U10.5@971.982,173.111
  Bottom Layer w0.3: v1(969.772,173.111) 968.873,173.111 967.765,174.219 967.765,182.296 969.264,183.794 980.542,183.794 981.456,184.709 R32.2@981.456,193.165
BV4: R33.2 U10.4 | length 47.6
  Top Layer w0.3: v1(969.226,173.911) U10.4@971.982,173.911
  Bottom Layer w0.3: v1(969.226,173.911) 968.4,174.736 968.4,181.966 969.62,183.185 993.648,183.185 994.461,183.998 994.461,192.962 R33.2@994.08,193.343
C_BT1: +B1-.1 R3.1 R39.2 R45.2 | length 62.7
  Top Layer w0.5: R39.2@937.057,186.429 936.588,186.429 935.685,187.332 935.685,197.746 936.676,198.737 R45.2@940.347,198.737
  Mid-Layer 1 w0.3: v2(938.632,198.737) 938.632,218.719 939.394,219.481 944.677,219.481 945.924,220.728 +B1-.1@945.924,231.394
  Bottom Layer w3: R3.1@943.331,225.806 943.331,228.778 +B1-.1@945.947,231.394
C_BT2: +B2-.1 R4.1 R41.2 R46.2 | length 66.3
  Top Layer w0.5: R41.2@955.065,186.626 954.673,186.626 954.1,187.35 954.1,197.469 955.37,198.892 R46.2@958.559,198.892
  Mid-Layer 1 w0.3: +B2-.1@954.966,236.449 956.843,234.571 956.843,199.425 v2(956.335,198.917)
  Bottom Layer w2.5: 954.507,233.381 954.507,235.989 +B2-.1@954.966,236.449
  Bottom Layer w3: R4.1@954.151,228.803 954.151,235.61 +B2-.1@954.989,236.449
C_BT3: +B3-.1 R5.1 R53.2 R59.2 | length 67.5
  Top Layer w0.5: R53.2@968.629,187.016 968.236,187.016 967.257,187.995 967.257,198.155 967.867,198.765 R59.2@971.945,198.765
  Mid-Layer 1 w0.3: +B3-.1@964.11,236.398 966.241,234.267 966.241,202.829 v2(970.305,198.765)
  Bottom Layer w2.5: 964.108,233.534 964.108,236.395 +B3-.1@964.11,236.398
  Bottom Layer w3: R5.1@964.133,228.829 +B3-.1@964.133,236.398
C_BT4: +B4-.1 R6.1 R55.2 R60.2 | length 66.2
  Top Layer w0.5: R55.2@982.066,186.813 981.393,186.813 980.719,187.487 980.719,198.155 981.659,199.095 R60.2@985.432,199.095
  Mid-Layer 1 w0.3: +B4-.1@980.468,236.525 982.523,234.47 982.523,200.339 v2(983.767,199.095)
  Bottom Layer w2.5: 980.465,233.661 +B4-.1@980.465,236.522
  Bottom Layer w3: R6.1@980.491,229.337 +B4-.1@980.491,236.525
CTRL_0: R70.2 R79.1 U9.4 | length 59.6
  Top Layer w0.3: R70.2@944.143,207.887 945.49,206.541 v1(945.49,204.495) ; v1(960.476,165.075) U9.4@960.476,167.04
  Mid-Layer 2 w0.3: v1(945.49,204.495) 945.49,186.461 947.842,184.109 952.668,184.109 953.135,183.642 953.135,173.025 956.335,169.824 960.069,169.824 960.476,169.418 v1(960.476,165.075)
  Bottom Layer w0.3: R79.1@958.825,166.79 958.825,165.71 959.46,165.075 v1(960.476,165.075)
CTRL_1: R71.2 R80.1 U9.5 | length 66.4
  Top Layer w0.3: v1(946.506,204.521) 946.506,205.613 947.598,206.705 954.493,206.705 R71.2@955.624,207.836 ; v1(961.746,165.1) U9.5@961.746,167.04
  Mid-Layer 2 w0.3: v1(946.506,204.521) 946.506,186.36 948.157,184.709 952.957,184.709 953.872,183.794 953.872,173.33 956.767,170.434 961.288,170.434 961.746,169.977 v1(961.746,165.1)
  Bottom Layer w0.3: R80.1@960.831,166.815 960.831,166.014 v1(961.746,165.1)
CTRL_2: R72.2 R81.1 U9.6 | length 62.4
  Top Layer w0.3: v1(954.557,205.054) 955.608,206.105 963.94,206.105 R72.2@965.454,207.62 ; v1(963.016,165.1) U9.6@963.016,167.04
  Mid-Layer 2 w0.3: v1(954.557,205.054) 954.557,173.634 957.021,171.171 962.558,171.171 963.016,170.713 v1(963.016,165.1)
  Bottom Layer w0.3: R81.1@962.838,166.841 962.838,165.278 v1(963.016,165.1)
CTRL_3: R73.2 R82.1 U9.7 | length 79.8
  Top Layer w0.3: v1(955.446,204.546) 956.405,205.505 980.307,205.505 981.05,206.248 R73.2@981.05,208.751 ; v1(964.286,165.1) U9.7@964.286,167.04
  Mid-Layer 2 w0.3: v1(955.446,204.546) 955.446,173.609 957.25,171.806 963.93,171.806 964.286,171.45 v1(964.286,165.1)
  Bottom Layer w0.3: v1(964.286,165.1) 964.87,165.684 R82.1@964.87,166.841
CTRL_4: R74.2 R83.1 U9.9 | length 57.5
  Top Layer w0.3: v1(965.581,175.387) U9.9@965.581,176.971
  Mid-Layer 2 w0.3: v1(959.739,204.648) 959.739,178.943 956.716,175.92 956.716,174.6 958.266,173.05 963.244,173.05 v1(965.581,175.387)
  Bottom Layer w0.3: R74.2@950.138,207.938 950.138,206.858 950.849,206.146 958.926,206.146 959.739,205.334 v1(959.739,204.648) ; R83.1@965.378,173.316 965.378,174.473 965.581,174.676 v1(965.581,175.387)
CTRL_5: R75.2 R84.1 U9.10 | length 43
  Top Layer w0.3: v1(964.235,175.412) U9.10@964.235,177.022
  Mid-Layer 2 w0.3: v1(960.755,204.648) 960.755,177.216 960.196,176.657 960.196,174.549 960.933,173.812 962.635,173.812 v1(964.235,175.412)
  Bottom Layer w0.3: v1(960.755,204.648) 960.755,206.172 961.314,206.731 R75.2@961.314,207.963 ; R84.1@963.346,173.316 963.346,174.168 964.235,175.057 v1(964.235,175.412)
CTRL_6: R76.2 R85.1 U9.11 | length 49
  Top Layer w0.3: v1(962.965,175.438) U9.11@962.965,177.022
  Mid-Layer 2 w0.3: v1(961.619,203.987) 961.619,176.987 960.882,176.251 960.882,174.981 961.314,174.549 962.076,174.549 v1(962.965,175.438)
  Bottom Layer w0.3: R85.1@961.339,173.367 961.339,173.736 962.965,175.362 v1(962.965,175.438) ; v1(961.619,203.987) 961.619,205.029 962.558,205.969 970.737,205.969 971.372,206.604 R76.2@971.372,207.862
CTRL_7: R77.2 R86.1 U9.12 | length 62.4
  Top Layer w0.3: v1(961.695,175.412) U9.12@961.695,177.022
  Mid-Layer 2 w0.3: v1(961.695,175.412) 962.533,176.251 v1(962.533,203.606)
  Bottom Layer w0.3: R86.1@959.333,173.392 959.37,173.392 961.39,175.412 v1(961.695,175.412) ; v1(962.533,203.606) 962.533,204.749 963.152,205.369 986.393,205.369 987.044,206.019 R77.2@987.044,208.852
DIO_SCL: R9.2 U9.14 U10.2 | length 20
  Top Layer w0.3: v1(959.155,174.6) 959.155,178.761 R9.2@960.464,180.07 ; v1(969.709,175.536) U10.2@971.982,175.536
  Mid-Layer 1 w0.3: v1(959.155,174.6) 960.044,173.711 967.883,173.711 v1(969.709,175.536)
DIO_SDA: R8.2 U9.15 U10.1 | length 20
  Top Layer w0.3: v1(957.885,175.362) 957.885,179.703 R8.2@958.227,180.045 ; v1(969.239,176.336) U10.1@971.982,176.336
  Mid-Layer 1 w0.3: v1(957.885,175.362) 960.298,175.362 961.161,174.498 967.4,174.498 v1(969.239,176.336)
EEP_SCL: R38.1 U10.35 U15.6 | length 22.2
  Top Layer w0.3: U10.35@981.382,178.336 981.382,179.783 983.285,181.686 986.434,181.686 988.136,183.388 993.232,183.388 993.867,182.753 993.867,181.407 993.461,181 990.168,181 989.85,180.682 R38.1@989.041,180.682
EEP_SDA: R67.1 U10.34 U15.5 | length 12
  Top Layer w0.3: U10.34@982.182,178.336 982.182,179.339 983.525,180.682 R67.1@986.968,180.682 988.556,182.27 U15.5@991.902,182.27
  Top Layer w0.5: R67.1@986.968,180.682 R67.1@986.968,180.721
FLASH: FLASH.1 LED.2 | length 66.8
  Mid-Layer 1 w1: v1(991.946,204.775) 991.946,219.075 995.02,222.148 998.601,222.148 1001.164,224.711 LED.2@1001.164,226.771
  Bottom Layer w1: v1(991.946,204.775) 993.826,202.895 1000.506,202.895 1002.995,200.406 1002.995,174.956 FLASH.1@1002.611,174.572